# Altium PCB PCB_V1.PcbDoc (part 1 of 2)
Units mm, origin at the board's own origin, x right, y up, seen from the top; angles counter-clockwise.
Board outline 81 x 52 mm, 4 copper layers (Top Layer, Int1 (GND), Int2 (PWR), Bottom Layer), stack 1.369 mm thick; 92 components, 65 nets, 289 pads, 303 vias.
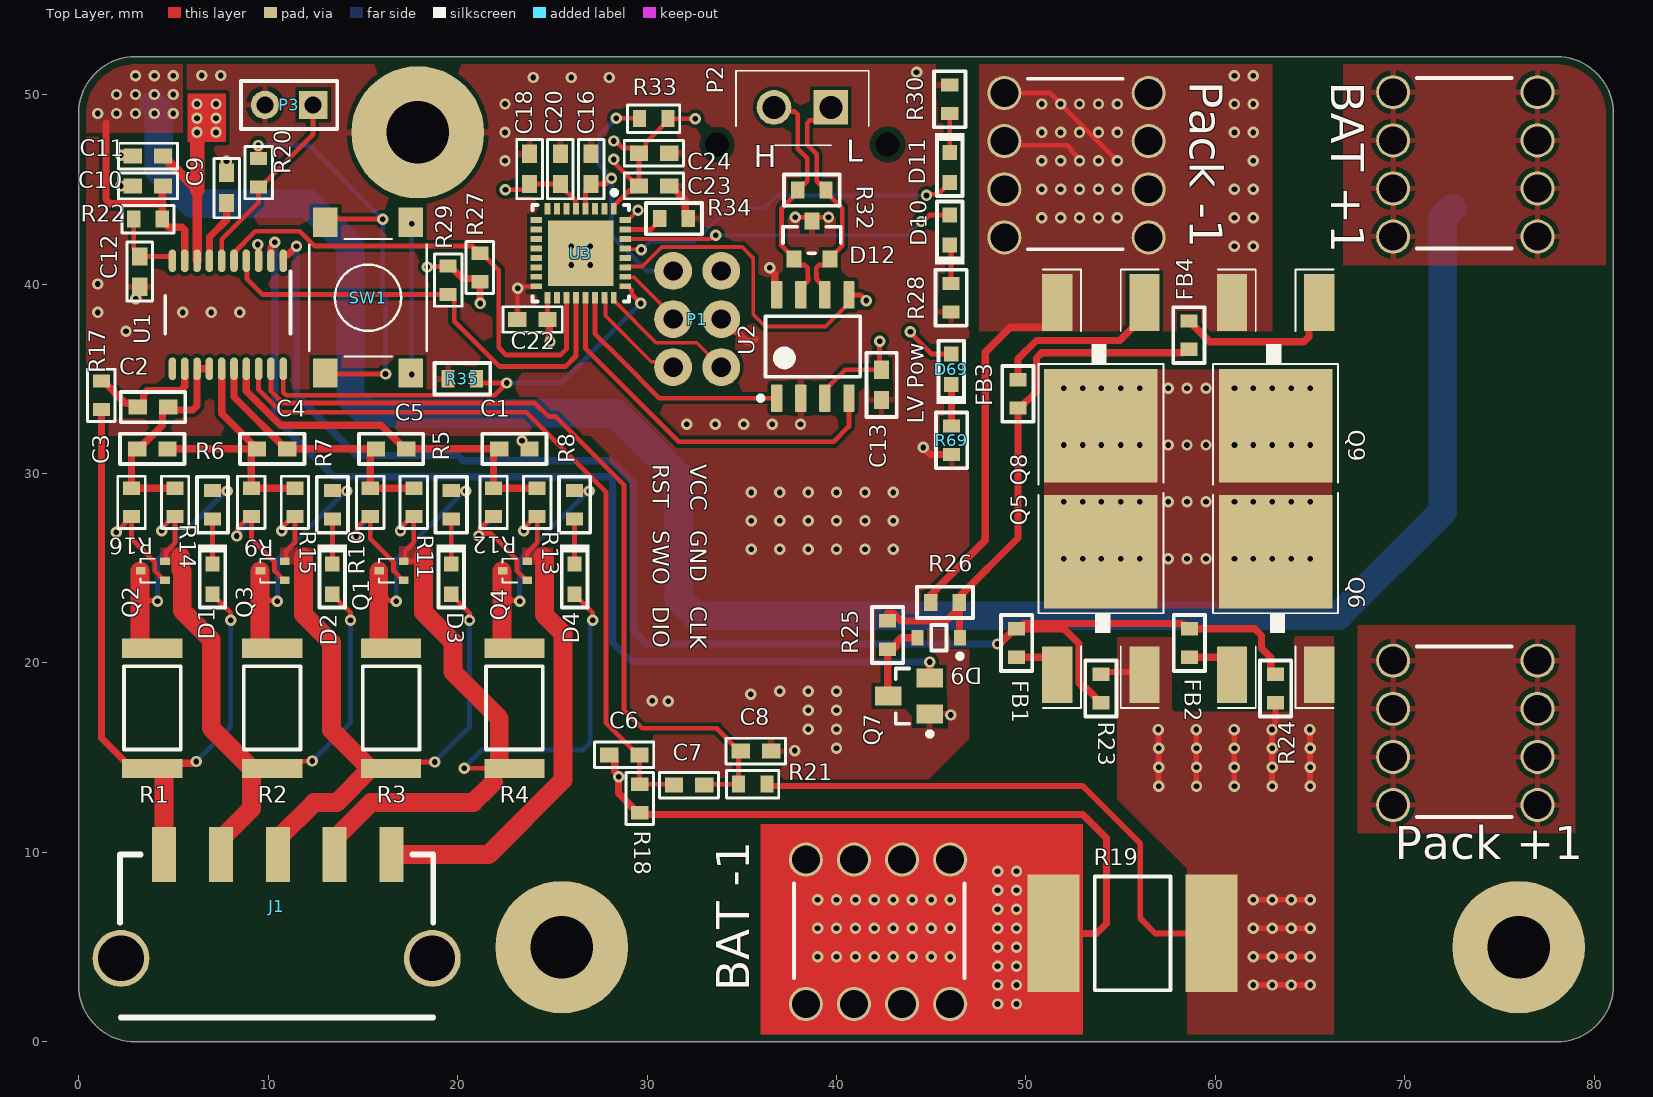
[diagram p0: Top Layer view]
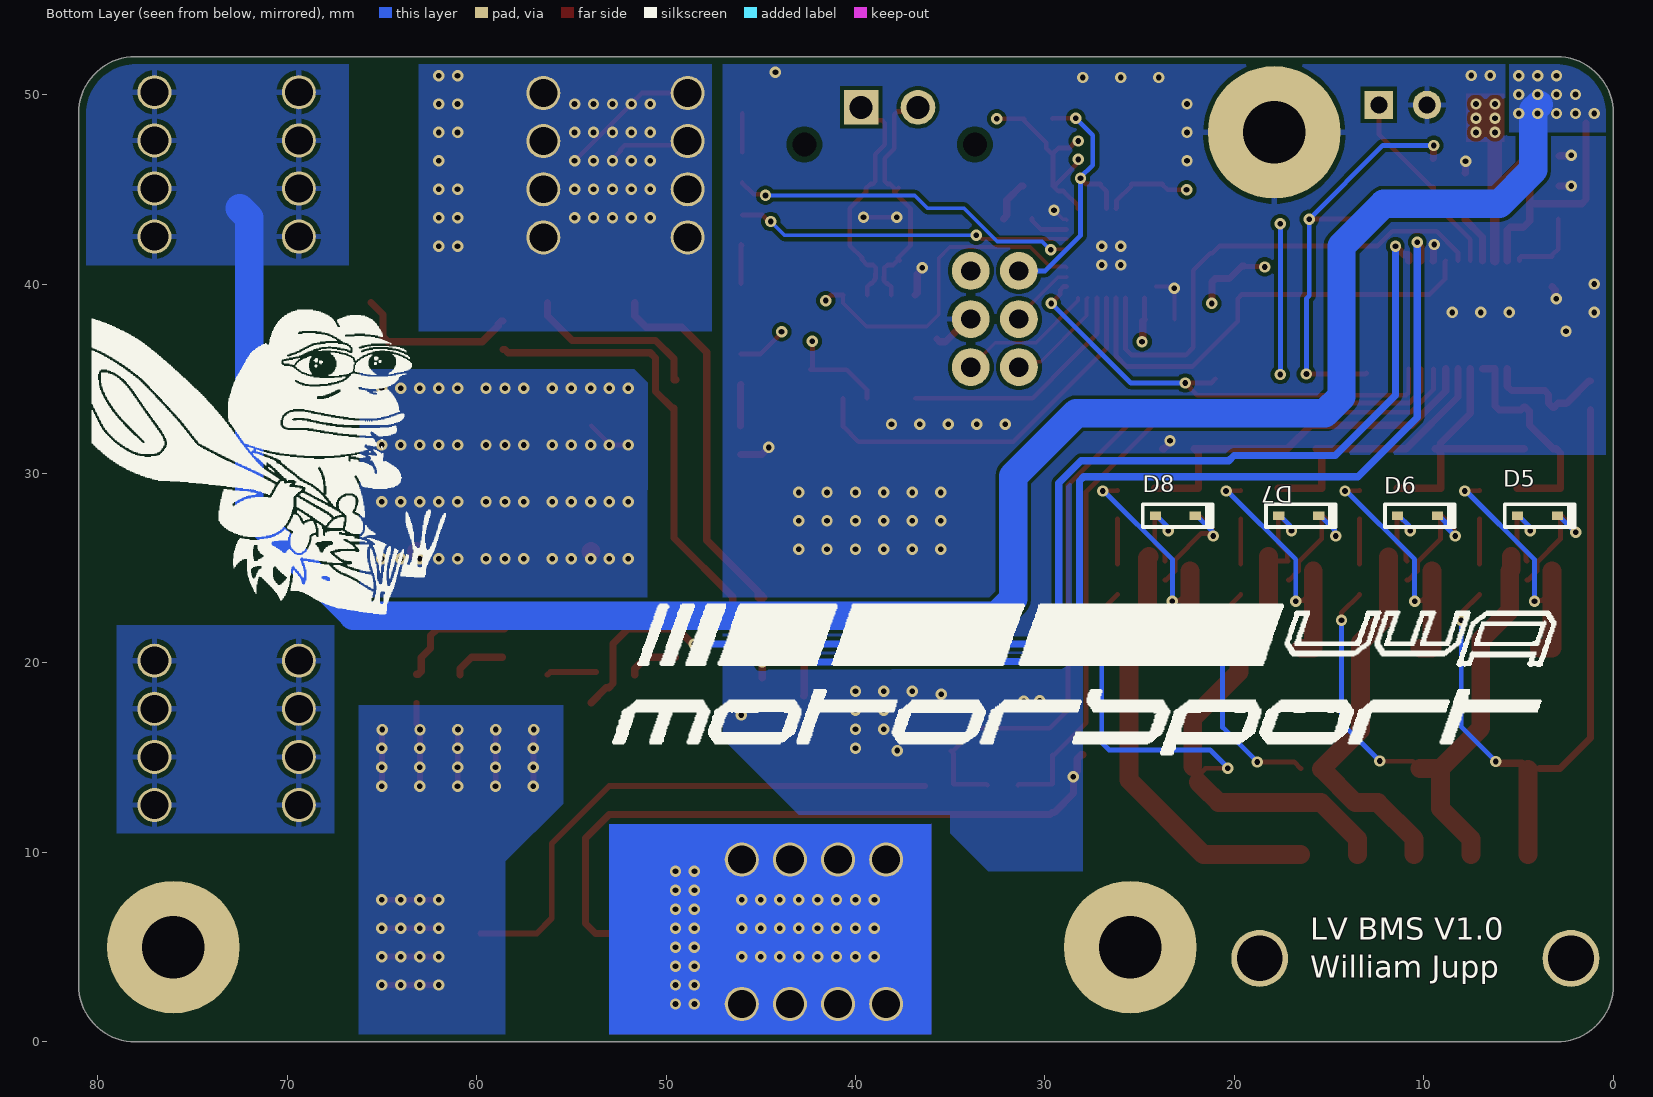
[diagram p1: Bottom Layer view, seen from below]
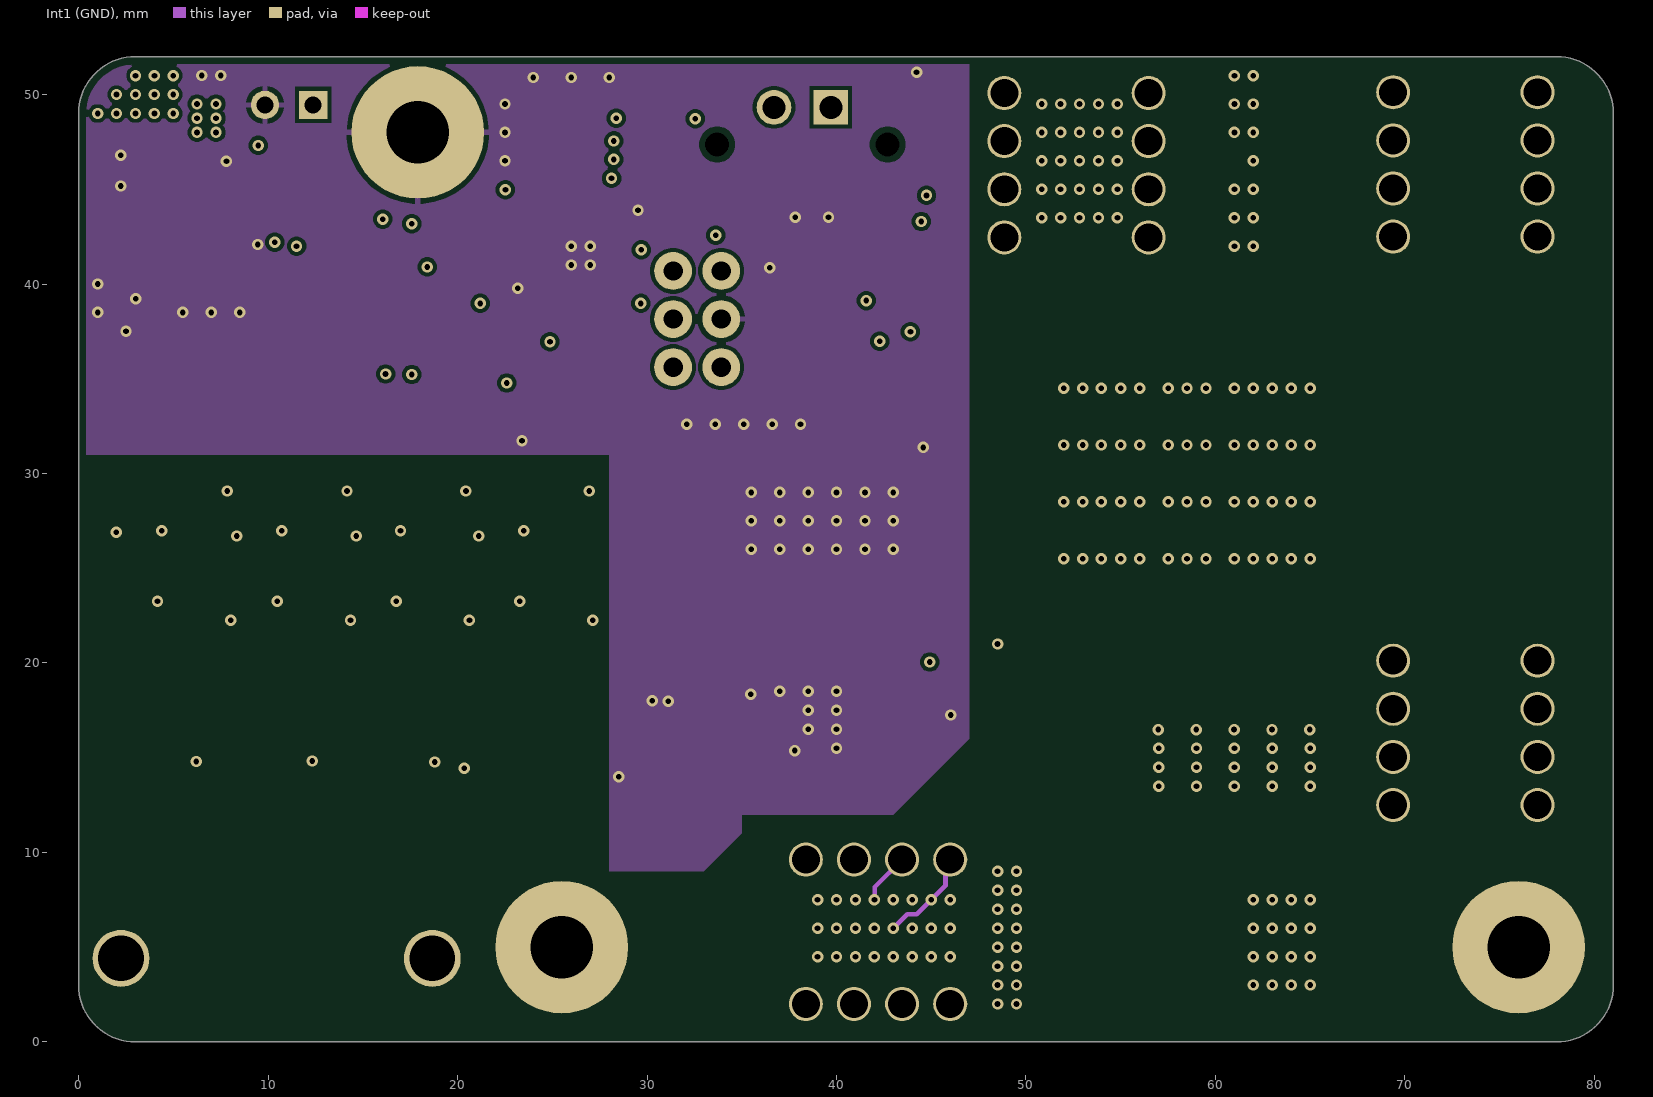
[diagram p2: Int1 (GND)]
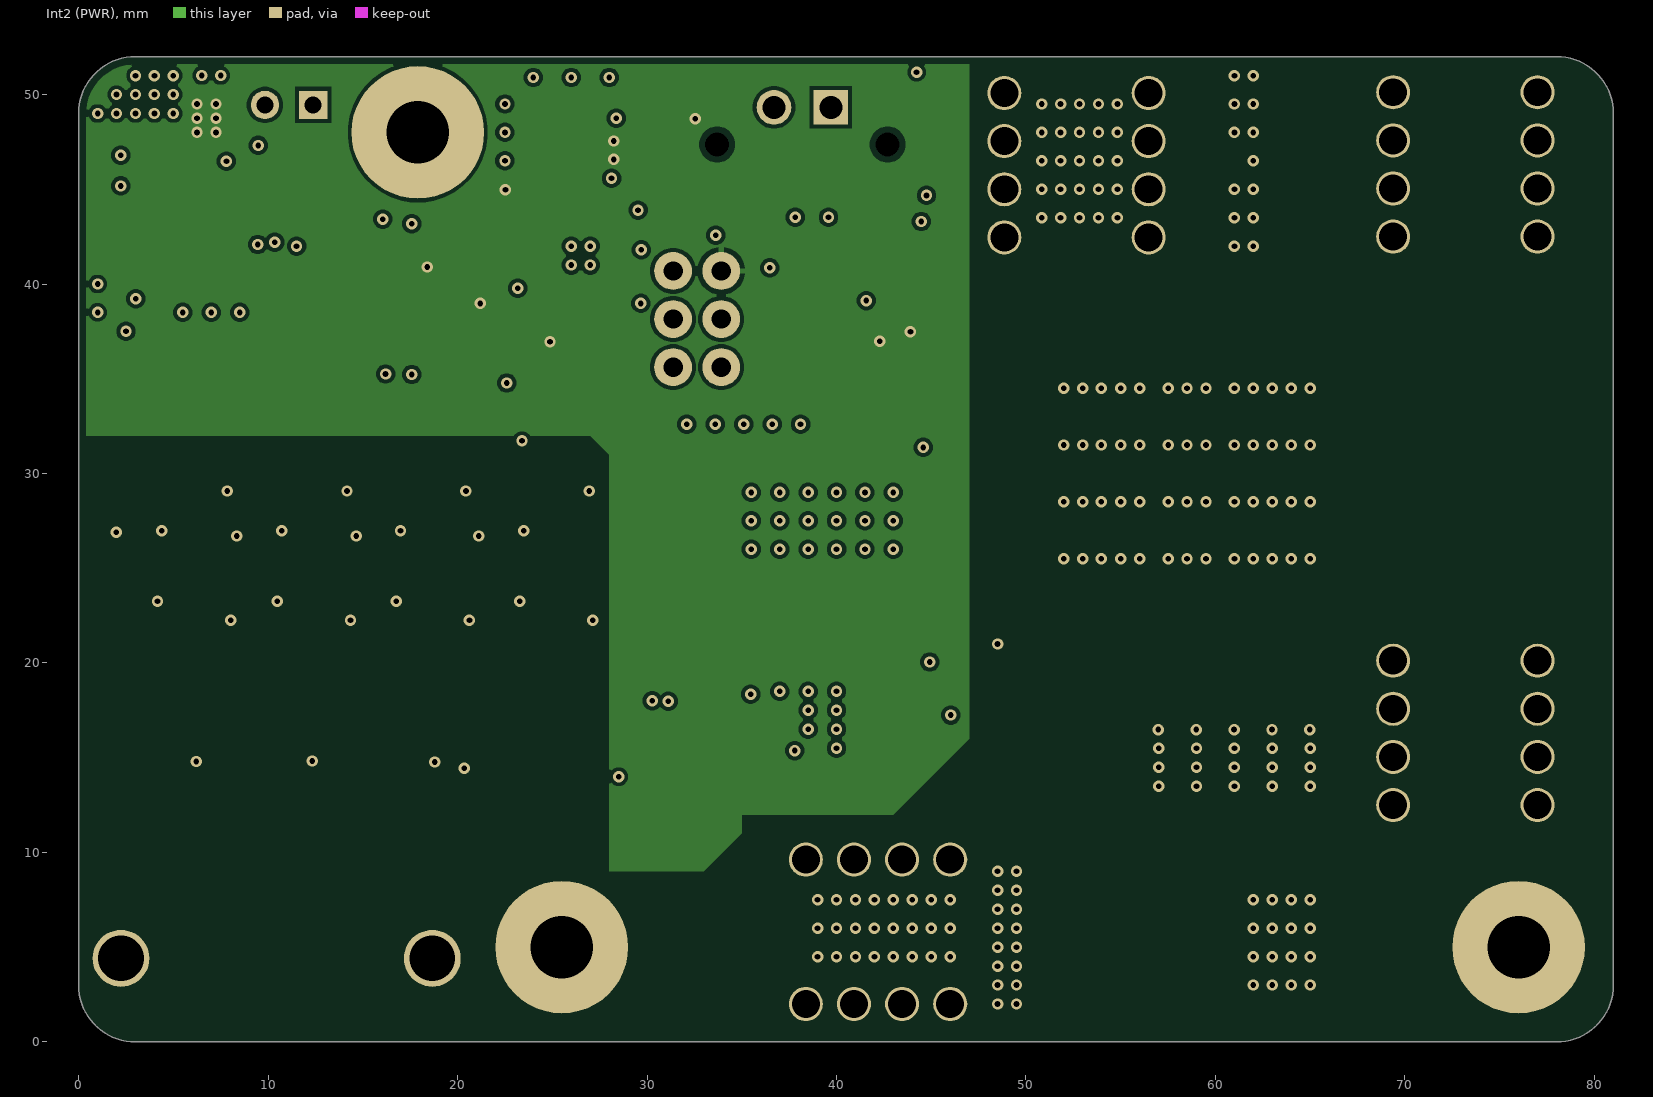
[diagram p3: Int2 (PWR)]
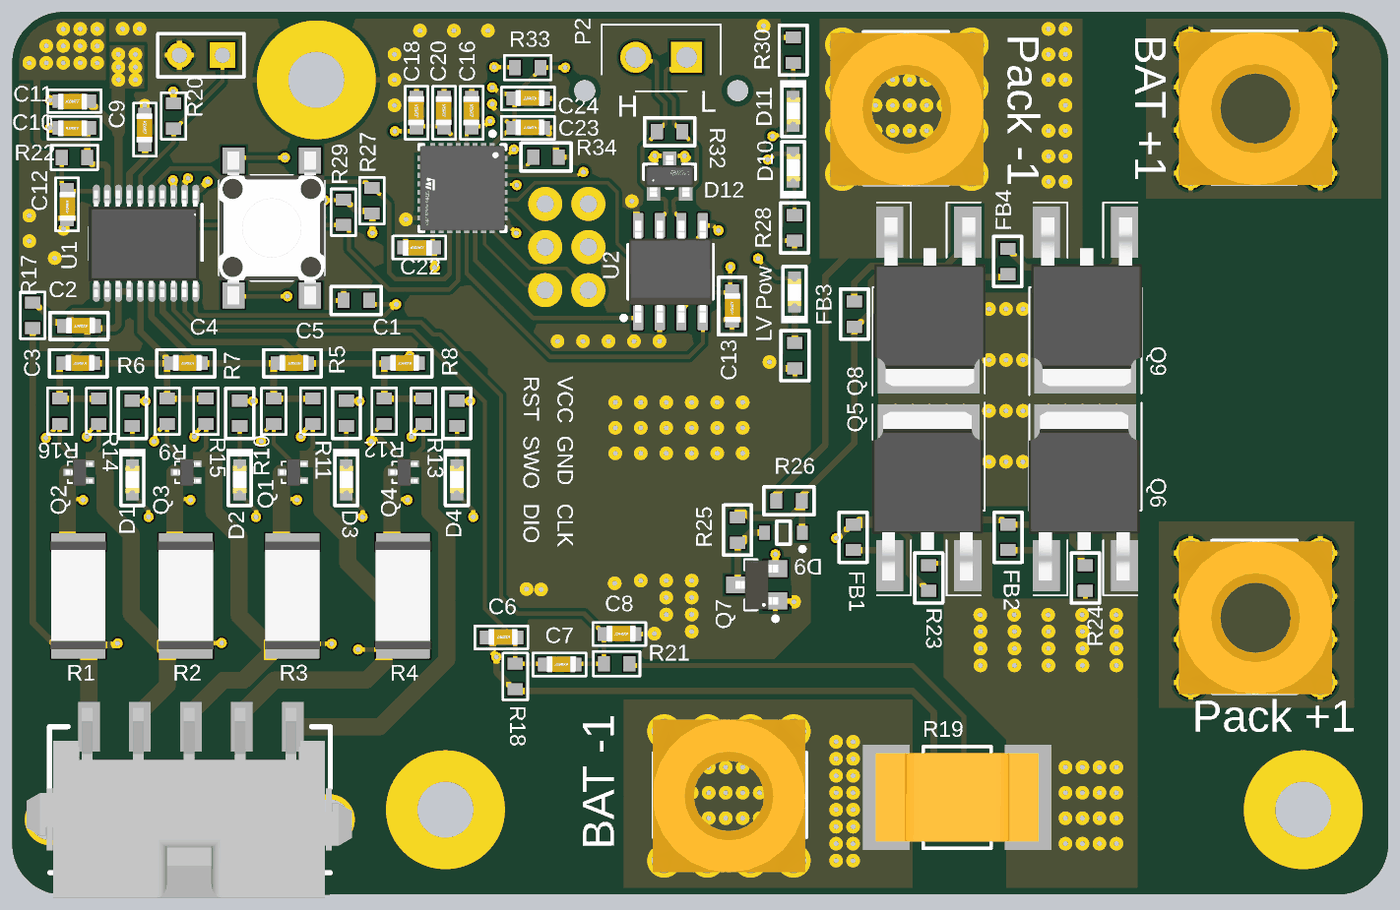
[diagram p4: 3D render of the assembled board from above, using the file's embedded part models]
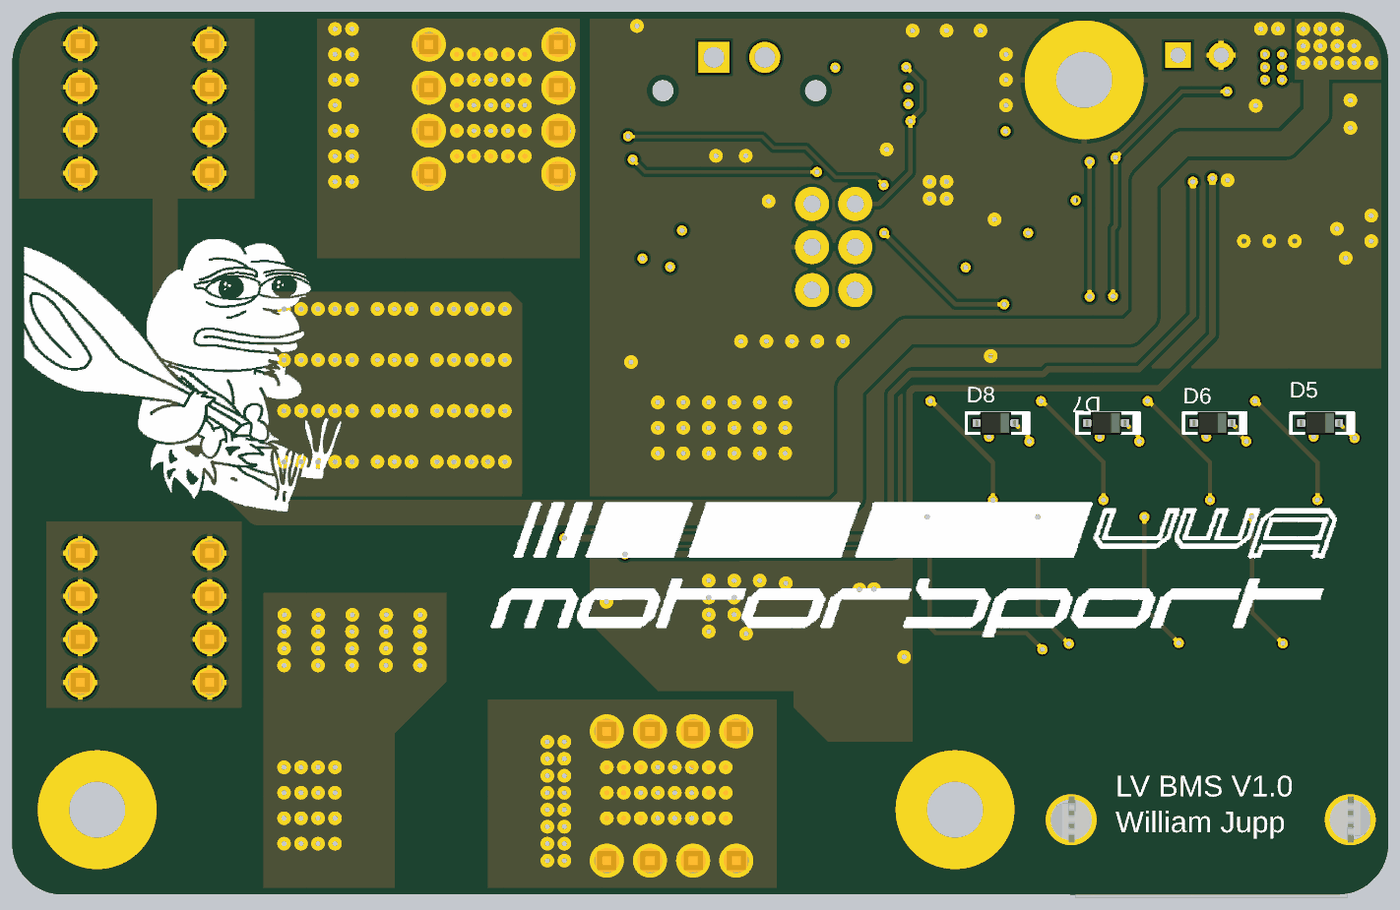
[diagram p5: 3D render of the assembled board from below, using the file's embedded part models]

## Layer stack, top to bottom
Top Solder: solder mask 0.0254, SM-001, Dk 4
Top Layer: signal copper 0.035
Dielectric 1: prepreg 0.1295, PP-017, Dk 4.3
Dielectric 2: prepreg 0.1295, PP-017, Dk 4.3
Int1 (GND): signal copper 0.035
Dielectric 3: core 0.7112, Core-039, Dk 4.8
Int2 (PWR): signal copper 0.035
Dielectric 4: prepreg 0.1295, PP-017, Dk 4.3
Dielectric 5: prepreg 0.1295, PP-017, Dk 4.3
Bottom Layer: signal copper 0.035
Bottom Solder: solder mask 0.0254, SM-001, Dk 4

## Board outline
3,0 cw(c3,3) 0,3 0,49 cw(c3,49) 3,52 78,52 cw(c78,49) 81,49 81,3 cw(c78,3) 78,0

## Design rules (kind name [scope] priority, off if disabled: settings)
BoardOutlineClearance [All] p1: gap=0.4 ignorepadtopadclearanceinfootprint=FALSE except(0: Text-OutlineEdge Text-CavityEdge Text-CutoutEdge Text-SplitBarrior Text-SplitContinuation)
Clearance [All] p1: gap=0.2 ignorepadtopadclearanceinfootprint=TRUE except(0.102: Arc-Via Track-Via SMDPad-Via; 0.152: Arc-Arc Arc-Track Arc-SMDPad Arc-THPad Arc-Text Track-Track Track-SMDPad Track-THPad Track-Text SMDPad-SMDPad SMDPad-THPad SMDPad-Text THPad-Text Via-Text Fill-Text Poly-Text Region-Text Text-Text; 0.3: THPad-Via Via-Via; 0.305: Arc-Hole Track-Hole SMDPad-Hole THPad-Hole Via-Hole Fill-Hole Poly-Hole Region-Hole Text-Hole; 0.45: THPad-THPad)
DiffPairsRouting DiffPair_USBDiffPairsRouting [InDifferentialPair ('USB')] p1: maxlimit=0.254 minlimit=0.127 mostfreqgap=0.254 toplayer_minwidth=0.2 toplayer_maxwidth=0.381 toplayer_prefwidth=0.206 midlayer1_minwidth=0.2 midlayer1_maxwidth=0.381 midlayer1_prefwidth=0.206 midlayer2_minwidth=0.2 midlayer2_maxwidth=0.381 midlayer2_prefwidth=0.206 bottomlayer_minwidth=0.2 bottomlayer_maxwidth=0.381 bottomlayer_prefwidth=0.206 maxuncoupledlength=12.7
DiffPairsRouting [All] p2: maxlimit=0.254 minlimit=0.2 mostfreqgap=0.254 toplayer_minwidth=0.25 toplayer_maxwidth=0.381 toplayer_prefwidth=0.381 midlayer1_mingap=0.254 midlayer1_minwidth=0.381 midlayer1_maxwidth=0.381 midlayer1_prefwidth=0.381 midlayer2_mingap=0.254 midlayer2_minwidth=0.381 midlayer2_maxwidth=0.381 midlayer2_prefwidth=0.381 bottomlayer_minwidth=0.25 bottomlayer_maxwidth=0.381 bottomlayer_prefwidth=0.381 maxuncoupledlength=12.7
HoleSize PTHHoleSize [All] p1: absolutevalues=TRUE maxlimit=5.8 minlimit=0.2 maxpercent=80.000 minpercent=20.000
HoleSize ViaHoleSize [IsVia] p2: absolutevalues=TRUE maxlimit=0.5 minlimit=0.2 maxpercent=80.000 minpercent=20.000
HoleToHoleClearance [All] p1: gap=0.45 allowstackedmicrovias=TRUE
MatchedLengths DiffPair_USBMatchedLengths [InDifferentialPair ('USB')] p1: tolerance=0.127 checknetsindiffpair=FALSE checkdiffpairvsdiffpair=TRUE checkxsignals=TRUE checkothers=TRUE
MinimumAnnularRing Via [IsVia] p1: minimumring=0.1
MinimumAnnularRing PTH [All] p2: minimumring=0.152
MinimumSolderMaskSliver [All] p1: minsoldermaskwidth=0.1
PlaneConnect [All] p1: planeconnectstyle=Direct reliefexpansion=0.508 reliefentries=4 reliefconductorwidth=0.254 reliefairgap=0
PolygonConnect "HC Connect" [InNetClass('HC')] p1: connectstyle=Direct reliefconductorwidth=1 reliefentries=4 polygonreliefangle="90 Angle" airgapwidth=0.254
PolygonConnect [All] p2: thpad.connectstyle=Relief thpad.reliefconductorwidth=0.3 thpad.reliefentries=4 thpad.polygonreliefangle="90 Angle" thpad.airgapwidth=0.254 smdpad.connectstyle=Relief smdpad.reliefconductorwidth=0.3 smdpad.reliefentries=4 smdpad.polygonreliefangle="90 Angle" smdpad.airgapwidth=0.254 via.connectstyle=Direct via.reliefconductorwidth=0.254 via.reliefentries=4 via.polygonreliefangle="90 Angle" via.airgapwidth=0.254
RoutingVias [All] p1: holewidth=0.3 width=0.6 viastyle="Through Hole" minholewidth=0.2 minwidth=0.45 maxholewidth=6.3 maxwidth=2
SilkToSilkClearance [All] p1: silktosilkclearance=0
SilkToSolderMaskClearance [IsPad] p1: minsilkscreentomaskgap=0.152 clearancetoexposedcopper=TRUE
SolderMaskExpansion [All] p1: expansion=0.102 istentingtop=FALSE
UnRoutedNet [All] p1: checkbadconnections=TRUE
Width [All] p1: maxlimit=30 minlimit=0.102 preferedwidth=0.25
22 further rules are at their usual default settings.

## Classes and differential pairs
net class HC: NetD2_2 NetD3_2 NetD4_2 NetD8_2 NetQ5_2 "Pack -" Rsns-
component class MCU: C13 C16 C18 C20 C22 C23 C24 D10 D11 D12 D69 P1 P2 R27 R28 R29 R30 R32 R33 R34 R69 U2 U3
component class "bq76920 IC": 3 "BAT +1" "BAT -1" C1 C2 C3 C4 C5 C6 C7 C8 C9 C10 C11 C12 D1 D2 D3 D4 D5 D6 D7 D8 D9 FB1 FB2 FB3 FB4 J1 P3 "Pack +1" "Pack -1" Q1 Q2 Q3 Q4 Q5 Q6 Q7 Q8 Q9 R1 R2 R3 R4 R5 R6 R7 R8 R9 R10 R11 R12 R13 R14 R15 R16 R17 R18 R19 R20 R21 R22 R23 R24 R25 R26 R35 SW1 U1
differential pair CAN: +CAN_P -CAN_N

## Components (designator, comment, footprint, x,y, rotation, side; value= is the part's Value field where it differs from the comment)
"BAT +1" "7460305" 7460305 69.38,50.12 r0 top
"BAT -1" "7460305" 7460305 46,9.62 r270 top
C1 "C0603C224K3RECAUTO" C_0603 23.8,31.3 r180 top value=0.22uF
C2 "C0603C224K3RECAUTO" C_0603 4.725,33.5 r180 top value=0.22uF
C3 "C0603C224K3RECAUTO" C_0603 4.69,31.3 r180 top value=0.22uF
C4 "C0603C224K3RECAUTO" C_0603 11.015,31.3 r180 top value=0.22uF
C5 "C0603C224K3RECAUTO" C_0603 17.29,31.3 r180 top value=0.22uF
C6 "C0603X104K5RAC7411" C_0603 29.6,15.15 r180 top value=100nF
C7 "C0603X104K5RAC7411" C_0603 33.025,13.55 r180 top value=100nF
C8 "C0603X104K5RAC7411" C_0603 36.55,15.35 r180 top value=100nF
C9 "C0603C105K9RAC7411" C_0603 7.812,45.875 r270 top value=1uF
C10 "CL10B105KA8VPNC" C_0603 2.85,45.175 r0 top value=1uF
C11 "JMK107BB7475KA-T" C_0603 2.85,46.75 r0 top value=4.7uF
C12 "GRM188R6YA106MA73J" C_0603 3.225,39.85 r90 top
C13 "06035C104JAT4A" C_0603 42.375,33.875 r90 top value=0.1uF
C16 "C0603X104K5RAC7411" C_0603 27.05,46.875 r270 top value=100nF
C18 "C0603C105K9RAC7411" C_0603 23.8,46.875 r270 top value=1uF
C20 "JMK107ABJ106KAHT" C_0603 25.425,46.875 r270 top value=10uF
C22 "C0603X104K5RAC7411" C_0603 23.15,38.125 r0 top value=100nF
C23 "C0603X104K5RAC7411" C_0603 31.175,45.175 r180 top value=100nF
C24 "JMK107BB7475KA-T" C_0603 31.175,46.9 r180 top value=4.7uF
D1 "150060BS55040" 150060xS55040 7.065,24.425 r270 top
D2 "150060BS55040" 150060xS55040 13.39,24.425 r270 top
D3 "150060BS55040" 150060xS55040 19.665,24.425 r270 top
D4 "150060BS55040" 150060xS55040 26.175,24.425 r270 top
D5 "MMSZ5232BS-7-F" MMSZ5232BS-7-F 2.952,27.775 r0 bottom
D6 "MMSZ5232BS-7-F" MMSZ5232BS-7-F 9.277,27.775 r0 bottom
D7 "MMSZ5232BS-7-F" MMSZ5232BS-7-F 15.552,27.775 r0 bottom
D8 "MMSZ5232BS-7-F" MMSZ5232BS-7-F 22.062,27.775 r0 bottom
D9 "MMDL6050T1G" ONSC-SOD-323-2-477-02_V 45.4,21.325 r180 top
D10 "150060RS55040" 150060xS55040 45.975,42.85 r90 top
D11 "150060BS55040" 150060xS55040 45.975,46.15 r270 top
D12 "SZNUP3105LT3G" FP-318-08-MFG 38.7,42.325 r90 top value=30pF
D69 "150060RS55040" 150060xS55040 46.05,35.5 r90 top
FB1 "BLM18SG221TN1D" R-0603 49.5,20.3 r90 top
FB2 "BLM18SG221TN1D" R-0603 58.625,20.3 r90 top
FB3 "BLM18SG221TN1D" R-0603 49.575,34.95 r270 top
FB4 "BLM18SG221TN1D" R-0603 58.6,38.05 r270 top
J1 "2-1445090-5" 2-1445090-5 10.45,7.15 r180 top
P1 "SWD Holes" "2*3 2.54mm header" 31.375,40.69 r270 top
P2 "Nothing" "2x1 2.54MM PITCH" 39.7,49.325 r180 top
P3 "For thermistor" HDR1X2 12.375,49.45 r180 top
"Pack +1" "7460305" 7460305 69.38,20.12 r0 top
"Pack -1" "7460305" 7460305 48.855,50.08 r0 top
Q1 "DMG1012T-13" SOT-523-3 16.515,24.875 r90 top
Q2 "DMG1012T-13" SOT-523-3 3.915,24.875 r90 top
Q3 "DMG1012T-13" SOT-523-3 10.24,24.875 r90 top
Q4 "DMG1012T-13" SOT-523-3 23.025,24.875 r90 top
Q5 "TK25S06N1L,LXHQ" DPAK+ 51.65,19.375 r0 top
Q6 "TK25S06N1L,LXHQ" DPAK+ 60.875,19.375 r0 top
Q7 "FDN5618P" FAIR-SSOT3L-3_V 43.825,18.25 r180 top
Q8 "TK25S06N1L,LXHQ" DPAK+ 56.25,39.025 r180 top
Q9 "TK25S06N1L,LXHQ" DPAK+ 65.475,39.025 r180 top
R1 "CRCW251221R0FKEGHP" R_2512 3.89,14.425 r90 top value=21R
R2 "CRCW251221R0FKEGHP" R_2512 10.215,14.425 r90 top value=21R
R3 "CRCW251221R0FKEGHP" R_2512 16.49,14.425 r90 top value=21R
R4 "CRCW251221R0FKEGHP" R_2512 23,14.425 r90 top value=21R
R5 "RT0603DRE07583RL" R-0603 19.665,27.6 r90 top value=583R
R6 "RT0603DRE07583RL" R-0603 7.065,27.6 r90 top value=583R
R7 "RT0603DRE07583RL" R-0603 13.39,27.6 r90 top value=583R
R8 "RT0603DRE07583RL" R-0603 26.175,27.6 r90 top value=583R
R9 "CMP0603AFX-1002ELF" R-0603 9.115,27.725 r90 top value=10K
R10 "CMP0603AFX-1002ELF" R-0603 15.39,27.725 r90 top value=10K
R11 "CRCW06031K00FKEAC" R-0603 17.69,27.725 r90 top value=1k
R12 "CMP0603AFX-1002ELF" R-0603 21.9,27.725 r90 top value=10K
R13 "CRCW06031K00FKEAC" R-0603 24.2,27.725 r90 top value=1K
R14 "CRCW06031K00FKEAC" R-0603 5.09,27.725 r90 top value=1k
R15 "CRCW06031K00FKEAC" R-0603 11.415,27.725 r90 top value=1k
R16 "CMP0603AFX-1002ELF" R-0603 2.79,27.725 r90 top value=10K
R17 "CRCW06031K00FKEAC" R-0603 1.2,33.375 r90 top value=1k
R18 "RN73R1JTTD1000F50" R-0603 29.615,12.1 r90 top value=100
R19 "PU3921FKM130R004L" PU3921FKM130R004L 55.625,5.725 r180 top value=4m
R20 "CMP0603AFX-1002ELF" R-0603 9.5,45.125 r90 top value=10k
R21 "RN73R1JTTD1000F50" R-0603 36.325,13.6 r180 top value=100
R22 "RN73R1JTTD1000F50" R-0603 2.913,43.425 r0 top value=100
R23 "CRCW06031M00FKEAC" R-0603 53.95,17.9 r90 top value=1M
R24 "CRCW06031M00FKEAC" R-0603 63.175,19.4 r270 top value=1M
R25 "CRCW06031M00FKEAC" R-0603 42.7,20.725 r90 top value=1M
R26 "CRCW06031M00FKEAC" R-0603 46.475,23.2 r180 top value=1M
R27 "CRCW06031K10JNEAC" R-0603 21.175,41.625 r270 top value=1k1
R28 "RT0603DRE07583RL" R-0603 46.05,40.025 r270 top value=630R
R29 "CRCW06031K10JNEAC" R-0603 19.5,39.45 r90 top value=1k1
R30 "RT0603DRE07583RL" R-0603 45.975,49 r90 top value=583R
R32 "Dont populate" R-0603 39.45,44.95 r180 top value=120R
R33 "CMP0603AFX-1002ELF" R-0603 29.6,48.725 r0 top value=10K
R34 "CMP0603AFX-1002ELF" R-0603 30.675,43.45 r0 top value=10K
R35 "CRCW06031M00FKEAC" R-0603 21,35 r180 top value=1M
R69 "RT0603DRE07583RL" R-0603 46.075,32.5 r270 top value=630R
SW1 "430152043836" 430152043836 15.275,39.275 r90 top
U1 "BQ76920" TSSOP-20 7.875,38.375 r270 top
U2 "SN65HVD233D" D0008A_N 38.75,36.7 r90 top
U3 "STM32L432KBU6" FP-UFQFPN32-A0B8-MFG 26.5,41.625 r270 top

## Footprints (in the part's own frame and the unit in brackets; to place one, negate y for a bottom-side part, rotate by r counter-clockwise, add the part's x,y. Pads: shape width x height; smd on the part's side, far side on the other; paste and mask are expansions set on the pad)
"2*3 2.54mm header" [mm]
  round 2 hole 1.02 mask+0: 1(0,0) 2(2.54,0) 3(5.08,0) 4(5.08,2.54) 5(2.54,2.54) 6(0,2.54)
2-1445090-5 [mm] "5pos Micro Mate-n-lok"
  rect 1.27x2.92 smd mask+0: 1(-6.065,-2.74) 2(-3.065,-2.74) 3(-0.065,-2.74) 4(2.935,-2.74) 5(5.935,-2.74)
  round 3 hole 2.41 unplated mask+0: MH(-8.215,2.74) MH(8.215,2.74)
  silkscreen extent -8.26,-2.74 8.27,5.86, body extent -9.54,-3.84 9.6,7.32, height 5.68
"2x1 2.54MM PITCH" [mm]
  rect 1.83x1.83 hole 1.22: 1(0,0)
  round 1.83 hole 1.22: 2(3,0)
  round 0.675 hole 1.27 unplated: MH1(-3,1.96) MH1(6,1.96)
  silkscreen extent -2,-1.93 5,2
150060xS55040 [mm] "Red LED"
  rect 0.8x0.75 smd mask+0: 1(-0.8,0) 2(0.8,0)
  silkscreen extent -1.83,-0.77 1.5,0.78, body extent -0.82,-0.4 0.78,0.4, height 0.41
7460305 [mm] "M5 Stuf"
  round 1.8 hole 1.475: 1(0,-7.62) 1(0,-5.08) 1(0,-2.54) 1(0,0) 1(7.62,-7.62) 1(7.62,-5.08) 1(7.62,-2.54) 1(7.62,0)
  silkscreen extent 1.25,-8.25 6.25,0.75, body extent -0.69,-8.31 8.31,0.69, height 7
430152043836 [mm] "6*6mm vertical type, SMD, height 4.3mm, salmon actuator, 360gf, T&R"
  rect 1.55x1.3 smd: 1(-3.975,2.25) 2(-3.975,-2.25) 3(3.975,2.25) 4(3.975,-2.25)
  silkscreen extent -3.1,-3.1 3.1,3.1, body extent -4.5,-3.1 4.5,3.1, height 4.29
C_0603 [mm] "0603 Capacitor"
  rect 0.965x0.8 smd: 1(0,0) 2(1.6,0)
  silkscreen extent -0.9,-0.8 2.5,0.8, body extent -0.17,-0.5 1.57,0.45, height 0.88
D0008A_N [mm] "SOIC, 8-Leads, Body 5x4mm, Pitch 1.27mm, IPC Medium Density"
  rrect17% 1.45x0.6 smd: 1(-2.725,1.905) 2(-2.725,0.635) 3(-2.725,-0.635) 4(-2.725,-1.905) 5(2.725,-1.905) 6(2.725,-0.635) 7(2.725,0.635) 8(2.725,1.905)
  silkscreen extent -2.85,-2.5 1.6,2.88, body extent -3,-2.45 3,2.45, height 1.63
DPAK+ [mm] "Power MOSFET (N-ch single 30V<VDSS=60V)"
  rect 1.6x3 smd mask+0: 1(0,0) 3(4.6,0)
  rect 6x6 smd mask+0: 2(2.3,6.5)
  silkscreen extent -1,-1.75 5.6,9.6, body extent -1.04,-0.87 5.5,9.07, height 2.3
FAIR-SSOT3L-3_V [mm] "SOT23, 3-Leads, Body 2.92x1.4mm, Pitch 0.95mm"
  rect 1.4x1 smd: 1(-1.1,0.95) 2(-1.1,-0.95) 3(1.1,0)
  silkscreen extent -1.23,-1.46 0.7,2.12, body extent -1.26,-1.46 1.26,1.46, height 1.12
FP-318-08-MFG [mm]
  rect 0.9x0.8 smd paste+0 mask+0: 1(-1,0.95) 2(-1,-0.95) 3(1,0)
  silkscreen extent -0.7,-1.52 0.7,1.52, body extent -1.55,-1.62 1.55,1.62, height 0.25
FP-UFQFPN32-A0B8-MFG [mm]
  rect 0.6x0.3 smd paste+0 mask+0: 1(-2.35,1.75) 2(-2.35,1.25) 3(-2.35,0.75) 4(-2.35,0.25) 5(-2.35,-0.25) 6(-2.35,-0.75) 7(-2.35,-1.25) 8(-2.35,-1.75) 17(2.35,-1.75) 18(2.35,-1.25) 19(2.35,-0.75) 20(2.35,-0.25) 21(2.35,0.25) 22(2.35,0.75) 23(2.35,1.25) 24(2.35,1.75)
  rect 0.3x0.6 smd paste+0 mask+0: 9(-1.75,-2.35) 10(-1.25,-2.35) 11(-0.75,-2.35) 12(-0.25,-2.35) 13(0.25,-2.35) 14(0.75,-2.35) 15(1.25,-2.35) 16(1.75,-2.35) 25(1.75,2.35) 26(1.25,2.35) 27(0.75,2.35) 28(0.25,2.35) 29(-0.25,2.35) 30(-0.75,2.35) 31(-1.25,2.35) 32(-1.75,2.35)
  rect 3.45x3.45 smd paste+0 mask+0: 33(0,0)
  silkscreen extent -3.32,-2.55 2.55,2.55, body extent -2.75,-2.75 2.75,2.75, height 0.25
HDR1X2 [mm] "Connector; Header; 2 Position"
  rect 1.5x1.5 hole 0.9: 1(0,0)
  round 1.5 hole 0.9: 2(2.54,0)
  silkscreen extent -1.27,-1.27 3.81,1.27
MMSZ5232BS-7-F [mm] "Balance Diode"
  rect 0.59x0.45 smd: 1(0,0) 2(2.11,0)
  silkscreen extent -0.9,-0.6 2.78,0.6, body extent -0.25,-0.67 2.35,0.68, height 1.12
ONSC-SOD-323-2-477-02_V [mm] "SOD, 2-Leads, Body 1.7x1.25mm"
  rect 0.63x0.83 smd: 1(-1.115,0) 2(1.115,0)
  silkscreen extent -1.24,-0.67 0.4,1.09, body extent -0.85,-0.63 0.85,0.63, height 1.06
PU3921FKM130R004L [mm] "4mOhm sense resistor"
  rect 2.75x6.2 smd mask+0: 1(-4.175,0) 2(4.175,0)
  silkscreen extent -2,-3 2,3, body extent -4.8,-2.6 4.8,2.6, height 0.89
R-0603 [mm] "0603 Resistor"
  rect 0.7x0.9 smd: 1(0,0) 2(1.5,0)
  silkscreen extent -0.72,-0.82 2.22,0.82, body extent -0.1,-0.48 1.6,0.47, height 0.9
R_2512 [mm] "2512 Resistor"
  rect 1.02x3.18 smd: 1(0,0) 2(6.35,0)
  silkscreen extent 1,-1.5 5.4,1.5, body extent 0.03,-1.63 6.37,1.63, height 0.62
SOT-523-3 [mm] "MOSFET"
  rect 0.4x0.51 smd mask+0: 1(-0.5,-0.645) 2(0.5,-0.645) 3(0,0.645)
  silkscreen extent -0.62,-0.13 0.63,0.65, body extent -0.8,-0.85 0.8,0.78, height 0.81
TSSOP-20 [mm] "Battery Management Li-Ion, Li-Phosphate Battery Moniter"
  oval 1.2x0.4 smd paste+0 mask+0: 1(-2.85,2.925) 2(-2.85,2.275) 3(-2.85,1.625) 4(-2.85,0.975) 5(-2.85,0.325) 6(-2.85,-0.325) 7(-2.85,-0.975) 8(-2.85,-1.625) 9(-2.85,-2.275) 10(-2.85,-2.925) 11(2.85,-2.925) 12(2.85,-2.275) 13(2.85,-1.625) 14(2.85,-0.975) 15(2.85,-0.325) 16(2.85,0.325) 17(2.85,0.975) 18(2.85,1.625) 19(2.85,2.275) 20(2.85,2.925)
  silkscreen extent -2.29,-3.3 1,3.3, body extent -3.11,-3.38 3.18,3.12, height 1.1

## Part data
"BAT +1" "BAT -1" "Pack +1" "Pack -1": "WP-BUTR Press-Fit with Internal thread, two rows, 9x9mm, 8 pins, M5x6mm, 160A", Operating Temperature="-55 to +150degC", Rated Current=160A, ComponentLink1Description=Manufacturer, ComponentLink1URL=http://www.we-online.de, ComponentLink2Description=Datasheet, ComponentLink2URL=https://katalog.we-online.com/em/datasheet/7460305.pdf, Height=7mm, Material=Brass, Mounting Technology=Press-Fit, Packaging=Bulk, Part Number=7460305, Pin Number=8, Published Date="September 2019", Publisher="Wurth Elektronik", Size=9x9mm, Surface=Tin, Thread=M5, Thread Length=6mm
C1 C2 C3 C4 C5: library part Capacitor, "Cap Ceramic 0.22uF 25V X7R 10% Pad SMD 0603 125C Automotive T/R", Capacitance=220nF, Case Code (Imperial)=0603, Case Code (Metric)=1608, Manufacturer=KEMET, Max Operating Temperature=125°C, Min Operating Temperature=-55°C, Ratings=AEC-Q200, Supplier Part Number 1=80-C0603C224K3REAUTO, Tolerance=10%, Voltage Rating=25V, Case/Package=0603, Category="Ceramic Capacitors", ComponentLink1Description=http://www.farnell.com/datasheets/2314375.pdf?src-supplier=Farnell, ComponentLink1URL=http://www.farnell.com/datasheets/2314375.pdf?src-supplier=Farnell, ComponentLink2Description=https://api.kemet.com/component-edge/download/datasheet/C0603C224K3RECAUTO.pdf?src-supplier=Digi-Key, ComponentLink2URL=https://api.kemet.com/component-edge/download/datasheet/C0603C224K3RECAUTO.pdf?src-supplier=Digi-Key, Manufacturer Part Number=C0603C224K3RECAUTO, Mount="Surface Mount", Packaging="Tape and Reel", Pricing 1="1=0.27000, 10=0.12200, 50=0.12200, 100=0.10400, 1000=0.06400, 10000=0.05300 (USD)", RoHS=Yes, RoHS Compliant=Yes, Stock 1=9648, Supplier 1=Mouser
C6 C7 C8 C16 C22 C23: library part Capacitor, "CAP CER 0.1UF 50V X7R 0603", Capacitance=100nF, Case Code (Imperial)=0603, Case Code (Metric)=1608, Dielectric Material=Ceramic, Manufacturer=KEMET, Max Operating Temperature=125°C, Min Operating Temperature=-55°C, Package Quantity=1, Supplier Part Number 1=2053261, Tolerance=10%, Voltage Rating=50V, Case/Package=0603, Category="Ceramic Capacitors", ComponentLink1Description=https://api.kemet.com/component-edge/download/datasheet/C0603X104K5RAC7411.pdf?src-supplier=Digi-Key, ComponentLink1URL=https://api.kemet.com/component-edge/download/datasheet/C0603X104K5RAC7411.pdf?src-supplier=Digi-Key, ComponentLink2Description=http://www.farnell.com/datasheets/2747793.pdf?src-supplier=Newark, ComponentLink2URL=http://www.farnell.com/datasheets/2747793.pdf?src-supplier=Newark, Features="Soft Termination", Length=0.064inch, Manufacturer Part Number=C0603X104K5RAC7411, Mount="Surface Mount", Packaging="Cut Tape", Pricing 1="15000=0.02900, 45000=0.02700 (USD)", RoHS=Yes, RoHS Compliant=Yes, Stock 1=28600, Supplier 1=RSComponents, Thickness=0.034inch, Voltage Rating (DC)=50V, Width=0.032inch
C9 C18: library part Capacitor, "Capacitor", Manufacturer=KEMET, Supplier Part Number 1=80-C0603C105K9R7411, Manufacturer Part Number=C0603C105K9RAC7411, Pricing 1="1=0.25000, 10=0.10200, 50=0.10200, 100=0.08700, 1000=0.05300, 10000=0.04400 (USD)", RoHS=Yes, RoHS Compliant=Yes, Supplier 1=Mouser
  C9: ComponentLink1Description="New link", Stock 1=22545
  C18: Stock 1=22716
C10: library part Capacitor, "Cap Ceramic 1uF 25V X7R 10% Pad SMD 0603 125°C Automotive T/R", Capacitance=1uF, Case Code (Imperial)=0603, Case Code (Metric)=1608, Manufacturer=KEMET, Manufacturer Part Number=C0603C105K9RAC7411, Max Operating Temperature=125°C, Min Operating Temperature=-55°C, Ratings=AEC-Q200, Supplier Part Number 1=80-C0603C105K9R7411, Tolerance=10%, Voltage Rating=25V, Case/Package=0603, Category="Ceramic Capacitors", ComponentLink1Description="New link", ComponentLink2Description=http://www.samsungsem.com/global/front/downloadcms.do?path=%2F%2Fglobal%2F%2Fsupport%2F%2Fproduct-search%2F%2Fmlcc%2F%2F__icsFiles%2F%2Fafieldfile%2F%2F2017%2F%2F05%2F%2F25&fileName=CL10B105KA8VPNC.pdf&src-supplier=Digi-Key, ComponentLink2URL=http://www.samsungsem.com/global/front/downloadcms.do?path=%2F%2Fglobal%2F%2Fsupport%2F%2Fproduct-search%2F%2Fmlcc%2F%2F__icsFiles%2F%2Fafieldfile%2F%2F2017%2F%2F05%2F%2F25&fileName=CL10B105KA8VPNC.pdf&src-supplier=Digi-Key, ComponentLink3Description=http://www.samsungsem.com/servlet/FileDownload?filename=productcatalog/pdf/MLCC.pdf&src-supplier=Avnet, ComponentLink3URL=http://www.samsungsem.com/servlet/FileDownload?filename=productcatalog/pdf/MLCC.pdf&src-supplier=Avnet, Features="Soft Termination", Length=0.063inch, Mount="Surface Mount", Packaging="Tape and Reel", Pricing 1="1=0.25000, 10=0.10200, 50=0.10200, 100=0.08700, 1000=0.05300, 10000=0.04400 (USD)", Pricing 2="1=0.20000, 10=0.14500, 50=0.14500, 100=0.06900, 1000=0.04200, 10000=0.04000 (USD)", RoHS=Yes, RoHS Compliant=Yes, Stock 1=22545, Stock 2=72139, Supplier 1=Mouser, Supplier 2=Mouser, Supplier Part Number 2=187-CL10B105KA8VPNC, Thickness=0.035inch, Width=0.031inch
C11 C24: library part Capacitor, "Cap Ceramic 4.7uF 6.3V X7R 10% Pad SMD 0603 125°C T/R", Capacitance=4.7uF, Case Code (Imperial)=0603, Case Code (Metric)=1608, Manufacturer="Taiyo Yuden", Max Operating Temperature=125°C, Min Operating Temperature=-55°C, Supplier Part Number 1=963-JMK107BB7475KA-T, Tolerance=10%, Voltage Rating=6.3V, Case/Package=0603, Category="Ceramic Capacitors", Lead Free="Lead Free", Manufacturer Part Number=JMK107BB7475KA-T, Mount="Surface Mount", Packaging="Cut Tape", Pricing 1="1=0.30000, 10=0.16700, 50=0.16700, 100=0.12200, 1000=0.10700, 10000=0.10100 (USD)", RoHS=Yes, RoHS Compliant=Yes, Stock 1=75256, Supplier 1=Mouser
  C11: ComponentLink1Description="New link", ComponentLink2Description=http://www.farnell.com/datasheets/2801343.pdf?src-supplier=Farnell, ComponentLink2URL=http://www.farnell.com/datasheets/2801343.pdf?src-supplier=Farnell, ComponentLink3Description=http://ds.yuden.co.jp/TYCOMPAS/ut/detail.do?productNo=JMK107BB7475KA-T&fileName=JMK107BB7475KA-T_SS&mode=specSheetDownload&src-supplier=Digi-Key, ComponentLink3URL=http://ds.yuden.co.jp/TYCOMPAS/ut/detail.do?productNo=JMK107BB7475KA-T&fileName=JMK107BB7475KA-T_SS&mode=specSheetDownload&src-supplier=Digi-Key, ComponentLink4Description="https://ds.yuden.co.jp/TYCOMPAS/ut/detail?pn=JMK107BB7475KA-T &u=M&src-supplier=Digi-Key", ComponentLink4URL="https://ds.yuden.co.jp/TYCOMPAS/ut/detail?pn=JMK107BB7475KA-T &u=M&src-supplier=Digi-Key", ComponentLink5Description=http://www.farnell.com/datasheets/2801343.pdf?src-supplier=Element14, ComponentLink5URL=http://www.farnell.com/datasheets/2801343.pdf?src-supplier=Element14, ComponentLink6Description=http://www.farnell.com/datasheets/2801343.pdf?src-supplier=Newark, ComponentLink6URL=http://www.farnell.com/datasheets/2801343.pdf?src-supplier=Newark
  C24: ComponentLink1Description=http://www.farnell.com/datasheets/2801343.pdf?src-supplier=Farnell, ComponentLink1URL=http://www.farnell.com/datasheets/2801343.pdf?src-supplier=Farnell, ComponentLink2Description=http://ds.yuden.co.jp/TYCOMPAS/ut/detail.do?productNo=JMK107BB7475KA-T&fileName=JMK107BB7475KA-T_SS&mode=specSheetDownload&src-supplier=Digi-Key, ComponentLink2URL=http://ds.yuden.co.jp/TYCOMPAS/ut/detail.do?productNo=JMK107BB7475KA-T&fileName=JMK107BB7475KA-T_SS&mode=specSheetDownload&src-supplier=Digi-Key, ComponentLink3Description="https://ds.yuden.co.jp/TYCOMPAS/ut/detail?pn=JMK107BB7475KA-T &u=M&src-supplier=Digi-Key", ComponentLink3URL="https://ds.yuden.co.jp/TYCOMPAS/ut/detail?pn=JMK107BB7475KA-T &u=M&src-supplier=Digi-Key", ComponentLink4Description=http://www.farnell.com/datasheets/2801343.pdf?src-supplier=Element14, ComponentLink4URL=http://www.farnell.com/datasheets/2801343.pdf?src-supplier=Element14, ComponentLink5Description=http://www.farnell.com/datasheets/2801343.pdf?src-supplier=Newark, ComponentLink5URL=http://www.farnell.com/datasheets/2801343.pdf?src-supplier=Newark
C12: library part Capacitor, "CAP CER 10UF X5R 0603", Capacitance=10uF, Case/Package=0603, Manufacturer=Murata, Max Operating Temperature=85°C, Min Operating Temperature=-55°C, Supplier Part Number 1=81-GRM188R6YA106MA3J, Tolerance=20%, Voltage Rating=35V, Category="Ceramic Capacitors", ComponentLink1Description=https://search.murata.co.jp/Ceramy/image/img/A01X/G101/ENG/GRM188R6YA106MA73-01A.pdf?src-supplier=Digi-Key, ComponentLink1URL=https://search.murata.co.jp/Ceramy/image/img/A01X/G101/ENG/GRM188R6YA106MA73-01A.pdf?src-supplier=Digi-Key, Manufacturer Part Number=GRM188R6YA106MA73J, Mount="Surface Mount", Packaging="Tape and Reel", Pricing 1="1=0.43000, 10=0.21100, 50=0.21100, 100=0.18100, 1000=0.11500, 10000=0.09300 (USD)", RoHS=Yes, RoHS Compliant=Yes, Stock 1=9408, Supplier 1=Mouser
C13: library part Capacitor, "Capacitor", Manufacturer="Kyocera AVX", Supplier Part Number 1=581-06035C104JAT4A, Category="Ceramic Capacitors", ComponentLink1Description="New link", Manufacturer Part Number=06035C104JAT4A, Pricing 1="1=0.11000, 10=0.04300, 50=0.04300, 100=0.03500, 1000=0.02000, 10000=0.01400 (USD)", RoHS=Yes, RoHS Compliant=Yes, Stock 1=26326, Supplier 1=Mouser
C20: library part Capacitor, "0603, 6.3V, X5R, 10 uF ± 10 %, T&R Q200 multilayer ceramic capacitor", Manufacturer="Taiyo Yuden", Supplier Part Number 1=963-JMK107ABJ106KAHT, Category="Ceramic Capacitors", Manufacturer Part Number=JMK107ABJ106KAHT, Pricing 1="1=0.30000, 10=0.10600, 50=0.10600, 100=0.07200, 1000=0.04800, 10000=0.03500 (USD)", RoHS=Yes, RoHS Compliant=Yes, Stock 1=12080, Supplier 1=Mouser
D1 D2 D3 D4 D11: "LED BLUE DIFFUSED 0603 SMD", Case/Package=0603, Color=Blue, Forward Voltage=3.2V, Manufacturer="Wurth Electronics", Supplier Part Number 1=710-150060BS55040, Test Current=20mA, ComponentLink1Description=http://www.farnell.com/datasheets/2621640.pdf?src-supplier=Farnell, ComponentLink1URL=http://www.farnell.com/datasheets/2621640.pdf?src-supplier=Farnell, ComponentLink2Description=https://www.we-online.de/web/en/index.php/download/media/07_electronic_components/download_center_1/application_notes_berichte/ano002_leds___the_future_of_horticultural_lighting/ANO002b_EN_LEDs_The_Future_of_Horticultural_Lighting.pdf?src-supplier=Digi-Key, ComponentLink2URL=https://www.we-online.de/web/en/index.php/download/media/07_electronic_components/download_center_1/application_notes_berichte/ano002_leds___the_future_of_horticultural_lighting/ANO002b_EN_LEDs_The_Future_of_Horticultural_Lighting.pdf?src-supplier=Digi-Key, ComponentLink3Description=https://katalog.we-online.de/pbs/datasheet/150060BS55040.pdf?src-supplier=Digi-Key, ComponentLink3URL=https://katalog.we-online.de/pbs/datasheet/150060BS55040.pdf?src-supplier=Digi-Key, Dominant Wavelength=470nm, Height=0.5mm, Length=1.6mm, Lens Size=0.8mm, Lens Style=Flat, Lens Transparency=Diffused, Luminous Intensity=80mcd, Manufacturer Part Number=150060BS55040, Mount="Surface Mount", Packaging="Tape and Reel", Pricing 1="1=0.18000, 10=0.16200, 50=0.13200, 100=0.11700, 1000=0.08800, 10000=0.08800 (USD)", RoHS=No, RoHS Compliant=No, Supplier 1=Mouser, Viewing Angle=140°, Width=0.8mm
D5 D6 D7 D8: "Balance Diode / MMSZ5232BS-7-F"
D9: library part CMP-1054-00066-1, "Switching Diode, 2-Pin SOD-323, Pb-Free, Tape and Reel", Manufacturer="On Semiconductor", ComponentLink1Description="Manufacturer URL", ComponentLink1URL=http://www.onsemi.com/, ComponentLink2Description=Datasheet, ComponentLink2URL=http://www.onsemi.cn/pub_link/Collateral/MMDL6050T1-D.PDF, ComponentLink3Description="Package Specification", ComponentLink3URL=http://www.onsemi.com/pub_link/Collateral/477-02.PDF.1, Configuration=Single, DatasheetVersion="Rev. 5", IF Max (A)=0.2, Mounting Technology="Surface Mount", PackageDescription="2-Pin SOD, Body 1.7 x 1.25 mm", PackageReference=SOD-323-2-477-02, PackageVersion="Rev. H, 03/2007", Packing="Tape and Reel", PartNumber=MMDL6050T1G, RoHS=TRUE, trr Max (ns)=4
D10 D69: "SMT Mono-color Chip LED Diffused"
D12: library part CMP-07200-000005-1, "TVS DIODE 32V 66V SOT23-3", Breakdown Voltage=35.6V, Capacitance=30pF, Clamping Voltage=66V, Manufacturer="ON Semiconductor", Max Junction Temp=+150°C, Package=318-08, Peak Pulse Current=8A, Peak Pulse Power=350W, Reverse Standoff Voltage=32V, Temperature="-55°C to +150°C", Temperature Range Low=-55°C, Automotive=Yes, Automotive Grade="Grade 0", Category=Diode, ComponentLink2Description=Datasheet, ComponentLink2URL=https://www.onsemi.com/pub/Collateral/NUP3105L-D.PDF, Device Class L1="Circuit Protection", Device Class L2="TVS Diodes", Device Class L3=unset, Digikey Description="TVS DIODE 32V 66V SOT23-3", Direction=Bidirectional, Footprint Url=https://www.onsemi.com/pub/Collateral/318-08.PDF, Height=1.11mm, Lead Free=Yes, Manufacturer Part Number=SZNUP3105LT3G, Mouser Description="32V Dual Line CAN Bus Protector in SOT-23 AEC-Q 24 V CAN Bus Protector in SOT-23", Number Of Channels=2, Octopart=https://octopart.com/sznup3105lt3g-on+semiconductor-54318507, RoHS=TRUE, Standoff Height=0.01mm, Temperature Range High=+150°C
FB1 FB2 FB3 FB4: "FERRITE BEAD 220 OHM 0603 1LN", Case Code (Imperial)=0603, Case Code (Metric)=1608, Current Rating=2.5A, DC Resistance (DCR)=40mR, Manufacturer=Murata, Max Operating Temperature=125°C, Min Operating Temperature=-55°C, Package Quantity=1, Supplier Part Number 1=81-BLM18SG221TN1D, Test Frequency=100MHz, Tolerance=25%, Case/Package=0603, Category=Inductors, Core Material=Ferrite, DC Current=2.5A, DC Resistance-Max=40mR, Depth=0.95mm, Height=0.8mm, Impedance=220R, Lead Free="Lead Free", Length=1.6mm, Manufacturer Part Number=BLM18SG221TN1D, Material=Ferrite,Steel, Max Current Rating=2.5A, Max DC Current=2.5A, Number of Circuits=1, Number of Lines=1, Number of Pins=2, Packaging="Tape and Reel", Pricing 1="1=0.13000, 10=0.07500, 50=0.07500, 100=0.05100, 1000=0.03800, 10000=0.03000 (USD)", Radiation Hardening=No, REACH SVHC="No SVHC", RoHS=Yes, RoHS Compliant=Yes, Series=BLM18S, Stock 1=126991, Supplier 1=Mouser, Termination=SMD/SMT, Weight=7.1E-05oz, Width=0.8mm
J1: "Micro MATE-N-LOK, Rectangular Power Connectors, Header, Plug, Wire-to-Board, 5 Position, 3mm [.118in] Centerline, Printed Circuit Board, UL 94V-0", Color=Black, Contact Current Rating=5A, Flammability Rating="UL94 V-0", Manufacturer="TE Connectivity", Max Operating Temperature=221°C, Min Operating Temperature=-40°C, Number of Power Positions=5, Package Quantity=215, Supplier Part Number 1=571-2-1445090-5, Approvals=CSA, Category=Connectors, Circuit Application=Power, ComponentLink1Description=https://datasheet.ciiva.com/9441/eng-cs-82181-softshell-high-density-0508-9441612.pdf?src-supplier=Avnet, ComponentLink1URL=https://datasheet.ciiva.com/9441/eng-cs-82181-softshell-high-density-0508-9441612.pdf?src-supplier=Avnet, ComponentLink2Description=https://datasheet.ciiva.com/729/eng-cd-1445090-b-729471.pdf?src-supplier=Digi-Key, ComponentLink2URL=https://datasheet.ciiva.com/729/eng-cd-1445090-b-729471.pdf?src-supplier=Digi-Key, Connector System=Wire-to-Board, Connector Type=Pin, Contact Material=Brass, Contact Plating=Gold,Tin, Contact Retention="No (Without)", Contact Type="Male Pin", ELV=Compliant, Fastening Type=Ramp, Height=8.11mm, Housing Color=Black, Housing Material=Nylon, Insulation Diameter=3mm, Lead Free="Lead Free", Length=19mm, Manufacturer Part Number=2-1445090-5, Mating Alignment="Yes (With)", Mating Retention="Yes (With)", Mount="Surface Mount", Number of Contacts=5, Number of Positions=5, Number of Rows=1, Orientation="Right Angle", Packaging=Tray, PCB Mount Alignment="No (Without)", PCB Mount Retention=With, PCB Mounting Orientation="Right Angle", PCB Thickness=0.062mm, Pitch=0.118inch, Plating Thickness=2.54um, Pricing 1="1=1.73000, 10=1.41000, 50=1.41000, 100=1.22000, 1000=0.95800, 10000=0.77900 (USD)", Radiation Hardening=No, RoHS=Yes, RoHS Compliant=Yes, Sealable="No (Without)", Series="Micro MATE-N-LOK", Stock 1=62, Strain Relief="No (Without)", Supplier 1=Mouser, Termination=SMD/SMT, VDE Tested=Yes, Width=3.86mm
P1: library part MHDR2X3, "Header, 3-Pin, Dual row", LatestRevisionDate=17-Jul-2002, LatestRevisionNote="Re-released for DXP Platform.", Publisher="Altium Limited"
P2: library part MHDR1X2, "Header, 2-Pin", LatestRevisionDate=17-Jul-2002, LatestRevisionNote="Re-released for DXP Platform.", Publisher="Altium Limited"
P3: library part "Header 2", "Header, 2-Pin", LatestRevisionDate=17-Jul-2002, LatestRevisionNote="Re-released for DXP Platform.", Publisher="Altium Limited"
Q1 Q2 Q3 Q4: "Trans Mosfet N-ch 20V 0.63A 3-PIN SOT-523 T/r", Case/Package=SOT-523, Continuous Drain Current (ID)=630mA, Drain to Source Voltage (Vdss)=20V, Input Capacitance=60.67pF, Manufacturer=Diodes, Max Operating Temperature=150°C, Max Power Dissipation=280mW, Min Operating Temperature=-55°C, Supplier Part Number 1=621-DMG1012T-13, Manufacturer Part Number=DMG1012T-13, Mount="Surface Mount", Packaging="Tape and Reel", Pricing 1="1=0.41000, 10=0.19900, 50=0.19900, 100=0.09600, 1000=0.05700, 10000=0.03900 (USD)", Rds On Max=400mR, RoHS=Yes, Stock 1=11363, Supplier 1=Mouser
Q5 Q6 Q8 Q9: "MOSFET 57W 1MHz Automotive; AEC-Q101", Case/Package=DPAK+, Manufacturer=Toshiba, Manufacturer Part Number=TK25S06N1L,LQ(O, Supplier Part Number 1=264-TK25S06N1LLXHQCT-ND, Category=MOSFETs, Pricing 1="1=0.89000, 10=0.75400, 50=0.75400, 100=0.56000, 1000=0.39100, 10000=0.33300 (USD)", RoHS=No, Stock 1=5332, Supplier 1=Digi-Key
Q7: library part CMP-2000-06255-1, "P-Channel Logic Level PowerTrench(R) MOSFET, -60 V, -1.25 A, 3-Pin SOT23, RoHS, Tape and Reel", Continuous Drain Current Id=1.25A, Current Id Max=1.2A, Current Temperature=25°C, Drain Source Voltage Vds=60V, Manufacturer="Fairchild Semiconductor", On Resistance Rds(on)=170mohm, Operating Temperature Max=150°C, Operating Temperature Min=-55°C, Operating Temperature Range=-55°Cto+150°C, Package / Case=SOT-23, Package Description="3-Pin Small Outline Transistor, Body 2.92 x 1.4 mm, Pitch 0.95 mm", Package Reference=SSOT3L, Package Version="Rev. 3, 05/2015", Power Dissipation Pd=500mW, Pulse Current Idm=10A, Rds(on) Test Voltage Vgs=-10V, Threshold Voltage Vgs Typ=20V, Voltage Vds Typ=-60V, Voltage Vgs th Max=-3V, Datasheet URL=https://www.fairchildsemi.com/datasheets/FD/FDN5618P.pdf, Datasheet Version="Rev. C, 10/2000", Device Marking=618, External Depth=2.5mm, External Length / Height=1.12mm, External Width=3.05mm, Full Power Rating Temperature=25°C, Manufacturer URL=https://www.fairchildsemi.com/, Mounting Technology=SurfaceMount, MSL=–, No. of Pins=3, Package URL=https://www.fairchildsemi.com/package-drawings/MA/MA03B.pdf, SMD Marking=618, SVHC=NoSVHC(19-Dec-2012), Tape Width=8mm, Transistor Case Style=SOT-23, Transistor Polarity=PChannel, Voltage Vds=60V, Voltage Vgs Max=20V, Voltage Vgs Rds on Measurement=-10V
R1 R2 R3 R4: library part Resistor, "RES SMD 21 OHM 1% 1.5W 2512", Case/Package=2512, Manufacturer="Vishay Dale", Max Operating Temperature=155°C, Max Power Dissipation=1.5W, Min Operating Temperature=-55°C, Package Quantity=2000, Resistance=21R, Resistor Type="Thick Film", Supplier Part Number 1=71-CRCW251221R0FKEGH, Temperature Coefficient=100ppm/°C, Tolerance=1%, Category="Chip SMD Resistors", ComponentLink1Description=http://www.vishay.com/docs/20043/crcwhpe3.pdf?src-supplier=Digi-Key, ComponentLink1URL=http://www.vishay.com/docs/20043/crcwhpe3.pdf?src-supplier=Digi-Key, Features="Automotive AEC-Q200", Height=0.028inch, Lead Free="Lead Free", Length=0.248inch, Manufacturer Part Number=CRCW251221R0FKEGHP, Number of Terminations=2, Packaging="Tape and Reel", Pricing 1="1=0.71000, 10=0.58900, 50=0.58900, 100=0.39600, 1000=0.23700, 10000=0.20600 (USD)", RoHS=Yes, RoHS Compliant=Yes, Series=CRCW-HP, Stock 1=1060, Supplier 1=Mouser, Width=0.124inch
R5 R6 R7 R8 R28 R30 R69: library part Resistor, "High Precision-High Stability Chip Resistor Thin Film 0603 583Ohm 0.5% Paper T/R", Case/Package=0603, Manufacturer=Yageo, Max Operating Temperature=155°C, Max Power Dissipation=100mW, Min Operating Temperature=-55°C, Resistance=583R, Resistor Type="Thin Film", Supplier Part Number 1=603-RT0603DRE07583RL, Temperature Coefficient=50ppm/°C, Tolerance=0.5%, Category="Chip SMD Resistors", ComponentLink1Description=http://www.yageo.com/documents/recent/PYu-RT_1-to-0.01_RoHS_L_9.pdf?src-supplier=Digi-Key, ComponentLink1URL=http://www.yageo.com/documents/recent/PYu-RT_1-to-0.01_RoHS_L_9.pdf?src-supplier=Digi-Key, Manufacturer Part Number=RT0603DRE07583RL, Number of Terminations=2, Packaging="Tape and Reel", Pricing 1="1=0.14000, 10=0.07400, 50=0.07400, 100=0.02600, 1000=0.01900, 10000=0.01200 (USD)", RoHS=Yes, Stock 1=17347, Supplier 1=Mouser
R9 R10 R12 R16 R20 R33 R34: library part Resistor, "Resistor", Manufacturer=Bourns, Supplier Part Number 1=652-CMP0603AFX-1002L, Manufacturer Part Number=CMP0603AFX-1002ELF, Pricing 1="1=0.21000, 10=0.09200, 50=0.09200, 100=0.05300, 1000=0.02900, 10000=0.02200 (USD)", RoHS=No, Stock 1=10216, Supplier 1=Mouser
R11 R13 R14 R15 R17: library part Resistor, "VISHAY - CRCW06031K00FKEA - SMD Chip Resistor, 0603 [1608 Metric], 1 kohm, CRCW e3 Series, 75 V, Thick Film, 100 mW", Case Code (Imperial)=0603, Case Code (Metric)=1608, Manufacturer="Vishay Dale", Manufacturer Part Number=CRCW06031K00FKEA, Max Operating Temperature=155°C, Max Power Dissipation=100mW, Min Operating Temperature=-55°C, Package Quantity=10, Resistance=1kR, Resistance Tolerance=1%, Resistor Type="Thick Film", Supplier Part Number 1=1694265, Temperature Coefficient=100ppm/°C, Voltage Rating=75V, Case/Package=0603, Category="Chip SMD Resistors", ComponentLink1Description=https://datasheet.ciiva.com/11808/0900766b80d98afc-11808625.pdf?src-supplier=RSComponents, ComponentLink1URL=https://datasheet.ciiva.com/11808/0900766b80d98afc-11808625.pdf?src-supplier=RSComponents, ComponentLink2Description=https://datasheet.ciiva.com/8336/dcrcwe3-8336822.pdf?src-supplier=Avnet, ComponentLink2URL=https://datasheet.ciiva.com/8336/dcrcwe3-8336822.pdf?src-supplier=Avnet, ComponentLink3Description=https://datasheet.ciiva.com/16515/dcrcwe3-16515078.pdf?src-supplier=Avnet+Asia, ComponentLink3URL=https://datasheet.ciiva.com/16515/dcrcwe3-16515078.pdf?src-supplier=Avnet+Asia, ComponentLink4Description=https://datasheet.ciiva.com/3257/dcrcwe3-3257132.pdf?src-supplier=Avnet, ComponentLink4URL=https://datasheet.ciiva.com/3257/dcrcwe3-3257132.pdf?src-supplier=Avnet, ComponentLink5Description=https://datasheet.ciiva.com/2465/dcrcwe3-2465534.pdf?src-supplier=Digi-Key, ComponentLink5URL=https://datasheet.ciiva.com/2465/dcrcwe3-2465534.pdf?src-supplier=Digi-Key, ComponentLink6Description=https://datasheet.ciiva.com/16893/dcrcwe3-16893742.pdf?src-supplier=Avnet+Europe, ComponentLink6URL=https://datasheet.ciiva.com/16893/dcrcwe3-16893742.pdf?src-supplier=Avnet+Europe, ComponentLink7Description=https://datasheet.ciiva.com/2465/dcrcwe3-2465535.pdf?src-supplier=Digi-Key, ComponentLink7URL=https://datasheet.ciiva.com/2465/dcrcwe3-2465535.pdf?src-supplier=Digi-Key, ComponentLink8Description=https://datasheet.ciiva.com/2465/dcrcwe3-2465536.pdf?src-supplier=Digi-Key, ComponentLink8URL=https://datasheet.ciiva.com/2465/dcrcwe3-2465536.pdf?src-supplier=Digi-Key, ComponentLink9Description=https://datasheet.ciiva.com/26316/fld-crcw-e3-data-en-26316551.pdf?src-supplier=Distrelec, ComponentLink9URL=https://datasheet.ciiva.com/26316/fld-crcw-e3-data-en-26316551.pdf?src-supplier=Distrelec, ComponentLink10Description=https://datasheet.ciiva.com/46441/1720486-46441623.pdf?src-supplier=Element14, ComponentLink10URL=https://datasheet.ciiva.com/46441/1720486-46441623.pdf?src-supplier=Element14, ComponentLink11Description=https://datasheet.ciiva.com/46441/1720486-46441622.pdf?src-supplier=Element14, ComponentLink11URL=https://datasheet.ciiva.com/46441/1720486-46441622.pdf?src-supplier=Element14, ComponentLink12Description=https://datasheet.ciiva.com/46385/1697337-46385497.pdf?src-supplier=Element14, ComponentLink12URL=https://datasheet.ciiva.com/46385/1697337-46385497.pdf?src-supplier=Element14, ComponentLink13Description=https://datasheet.ciiva.com/16199/dcrcwe3-16199053.pdf?src-supplier=Future+Electronics, ComponentLink13URL=https://datasheet.ciiva.com/16199/dcrcwe3-16199053.pdf?src-supplier=Future+Electronics, Construction=Rectangular, Contact Plating=Tin, Depth=0.85mm, Features="Automotive AEC-Q200", Height=0.45mm, Lead Free="Lead Free", Length=1.55mm, Military Standard=Not, Mount="Surface Mount", Number of Pins=2, Number of Terminations=2, Packaging="Tape and Reel", Power Rating=100mW, Pricing 1="5000=0.00500, 10000=0.00400, 20000=0.00400 (USD)", Radiation Hardening=No, REACH SVHC=Unknown, RoHS=Yes, RoHS Compliant=Yes, Series=CRCW, Size Code=0603, Stock 1=30000, Supplier 1=RSComponents, Technology="THICK FILM", Termination=SMD/SMT, Tolerance=1%, Voltage Rating (DC)=75V, Weight=7.1E-05oz, Width=0.033inch
R18 R21 R22: library part Resistor, "Resistor", Manufacturer="KOA Speer", Supplier Part Number 1=660-RN73R1JTD1000F50, Manufacturer Part Number=RN73R1JTTD1000F50, Pricing 1="1=0.20000, 10=0.20000, 50=0.15200, 100=0.11800, 1000=0.07700, 10000=0.04700 (USD)", RoHS=No, Stock 1=4124, Supplier 1=Mouser
R19: library part Resistor, "Res Metal Plate 3921 0.004 Ohm 1% 3W ±75ppm/C Pad SMD Automotive T/R", Case/Package=3921, Manufacturer=Yageo, Max Operating Temperature=170°C, Max Power Dissipation=3W, Min Operating Temperature=-65°C, Resistance=4mR, Resistor Type="Metal Element", Supplier Part Number 1=603-PU3921FKM130R004, Temperature Coefficient=75ppm/°C, Tolerance=1%, Category="Chip SMD Resistors", ComponentLink1Description=http://www.yageo.com/documents/recent/PYu-PU_51_RoHS_L_3.pdf?src-supplier=Digi-Key, ComponentLink1URL=http://www.yageo.com/documents/recent/PYu-PU_51_RoHS_L_3.pdf?src-supplier=Digi-Key, Features="Moisture Resistant,Automotive AEC-Q200", Height=0.019inch, Length=0.394inch, Manufacturer Part Number=PU3921FKM130R004L, Number of Terminations=2, Packaging="Tape and Reel", Pricing 1="1=1.40000, 10=1.14000, 50=1.14000, 100=0.75800, 1000=0.53100, 10000=0.45200 (USD)", RoHS=Yes, RoHS Compliant=Yes, Stock 1=2383, Supplier 1=Mouser, Width=0.205inch
R23 R24 R25 R26 R35: library part Resistor, "Resistor", Case/Package=Molded, Manufacturer=Vishay, Max Operating Temperature=155°C, Min Operating Temperature=-55°C, Power Rating=100mW, Resistance=1MR, Resistor Type="Thick Film", Temperature Coefficient=100ppm/°C, Tolerance=1%, Category="Chip SMD Resistors", Contact Plating=Tin, Lead Free="Lead Free", Length=1.55mm, Manufacturer Part Number=CRCW06031M00FKEAC, Mount="Surface Mount", RoHS Compliant=Yes, Termination=Wraparound
R27 R29: library part Resistor, "Resistor", Manufacturer=Vishay, Supplier Part Number 1=71-CRCW06031K10JNEAC, Category="Chip SMD Resistors", Manufacturer Part Number=CRCW06031K10JNEAC, Pricing 1="1=0.10000, 10=0.03000, 50=0.03000, 100=0.01200, 1000=0.00500, 10000=0.00300 (USD)", RoHS=Yes, RoHS Compliant=Yes, Stock 1=51915, Supplier 1=Mouser
R32: library part Resistor, "Bus termination resistor"
SW1: library part CMP-1452-00002-1, "WS-TASV SMD Tact Switch 6X6 mm", Manufacturer="Wuerth Elektronik", ComponentLink1Description="Manufacturer URL", ComponentLink1URL=http://www.we-online.com, ComponentLink2Description=Datasheet, ComponentLink2URL=http://katalog.we-online.de/em/datasheet/4301x2.pdf, NoPins=04, PackageReference=430152043836, PartNumber=430152043836
U1: "3 to 5-Series Cell Li-Ion and Li-Phosphate Battery Monitor", Case/Package=TSSOP, Manufacturer="Texas Instruments", Manufacturer Part Number=BQ7692003PWR, Max Operating Temperature=85°C, Min Operating Temperature=-40°C, Operating Supply Voltage=25V, Output Voltage=3.6V, Package Quantity=2000, Supplier Part Number 1=595-BQ7692003PWR, Category="Battery Management", Contact Plating=Gold, Fault Protection="Over Current,Short Circuit,Over/Under Voltage", Interface=I2C, Lead Free="Lead Free", Mount="Surface Mount", Number of Pins=20, Packaging="Tape and Reel", RoHS Compliant=Yes, Supplier 1=Mouser, Weight=0.002758oz
U2: library part CMP-0315-00036-2, "3.3V CAN Transceiver with Standby Mode, Loop-back, 6 mA, -40 to 125 degC, 8-pin SOIC (D), Green (RoHS & no Sb/Br)", Bus Fault Voltage(V)=+/-30, Drivers Per Package=1, Low Power Mode=Standby, Manufacturer="Texas Instruments", Rating=Catalog, Supply Voltage(s)(V)=3.3, Code_JEDEC=MS-012AA, ComponentLink1Description=Datasheet, ComponentLink1URL=http://www.ti.com/general/docs/lit/getliterature.tsp?genericPartNumber=SN65HVD233&fileType=pdf, DatasheetVersion=SLLS557F, Eco-Plan="Green (RoHS & no Sb/Br)", Features="Loop Back", ICC(Max)(mA)=6, Isolated=No, Mounting Technology="Surface Mount", PackageDescription="8-Pin Plastic Small Outline Integrated Circuit, 4.9 x 3.9 mm, Pitch 1.27 mm Pitch", PackageReference=D0008A, PackageVersion="revM, Jun-2011", PartNumber=SN65HVD233D, Receivers Per Package=1, SubFamily=CAN, Transient Pulse Protection(V)="-100 to 100"
U3: library part CMP-12105-000014-1, "IC MCU 32BIT 128KB FLASH 32QFPN", Ambient Temperature Range High=+85°C, Ambient Temperature Range Low=-40°C, Frequency=80MHz, Manufacturer=STMicroelectronics, Max Junction Temp=+105°C, Max Supply Voltage=3.6V, Min Supply Voltage=1.62V, Package=UFQFPN32-A0B8, Temperature="-40°C to +85°C", Automotive=No, Category=IC, ComponentLink2Description=Datasheet, ComponentLink2URL=https://www.st.com/resource/en/datasheet/stm32l432kb.pdf, Core Architecture="ARM Cortex-M4", Data Bus Width=32bits, Device Class L1="Integrated Circuits (ICs)", Device Class L2="Embedded Processors and Controllers", Device Class L3=Microcontrollers, Digikey Description="IC MCU 32BIT 128KB FLASH 32QFPN", Height=0.6mm, Interface=I2C,SPI,UART,USART,USB,IrDA, Ipc Land Pattern Name=QFN50P500X500X55-32, Lead Free=Yes, Manufacturer Part Number=STM32L432KBU6, Memory Size=128KBytes, Memory Type=FLASH, Number Of A/D Converters=1, Number Of Adc Channels=10, Number Of Cores=1, Number Of I2C Channels=2, Number Of I/Os=26, Number Of Spi Channels=2, Number Of Timers/Counters=8, Number Of Uart Channels=1, Octopart=https://octopart.com/stm32l432kbu6-stmicroelectronics-74568735, Ram Size=64KBytes, RoHS=TRUE, Temperature Range High=+85°C, Temperature Range Low=-40°C

## Free pads (board coordinates)
  round 7 hole 3.3 mask+0: MH(17.9,48)
  round 7 hole 3.3 unplated mask+0: MH(25.5,5) MH(76,5)

## Via types
v1: diameter 0.6, hole 0.3, Top Layer to Bottom Layer, 303 vias

## Nets (pads, with @x,y where several pads share a name; then routed paths per layer and width w, separated by ;. In a path a pad name is that pad's centre, name@x,y a point inside that pad or via, vN(x,y) a via of type N, cw(c..) or ccw(c..) an arc to the next point about the centre after c; other vN are vias at no path point)
ALERT: R35.1 U1.20 U3.25 | length 25.2
  Top Layer w0.254: U1.20 10.8,34.274 10.949,34.125 21.95,34.125 v1(22.6,34.775) 21.223,34.775 21,34.998 R35.1 ; U3.25 29,39.875 29.193,39.682 29.193,39.457 v1(29.675,38.975)
  Bottom Layer w0.254: v1(22.6,34.775) 25.475,34.775 v1(29.675,38.975)
"Bat +": "BAT +1.1" C10.2 R22.2 U1.9 | length 120
  Top Layer w0.381: 1.45,48.5 1.45,44.454 1.673,44.231 4.413,44.231 ; C10.2 4.413,45.137 4.413,44.231 ; U1.9 5.6,42.851 5.451,43 4.738,43 4.413,43.325 R22.2 4.413,44.231
  Bottom Layer w1.5: 3.925,49.475 4.225,49.175 4.225,46.025 6.025,44.225 12.125,44.225 14.35,42 14.35,34.054 15.229,33.175 28.35,33.175 31.675,29.85 31.675,23.379 32.554,22.5 66.5,22.5 72,28 72,43.5 72.5,44
  other v1: 1,49 2,49 3,49 4,49 5,49 2,50 3,50 4,50 5,50 3,51 4,51 5,51
CAN_LBK: U2.5 U3.27 | length 17.7
  Top Layer w0.2: U3.27 28.9,40.925 29.75,40.925 30.775,41.95 35.025,41.95 35.6,41.375 35.6,38.4 36.242,37.758 39.413,37.758 40.655,39 U2.5
  Top Layer w0.25: U2.5 41.267,39.425 41.567,39.125 v1(41.575,39.125)
CAN_N: D12.2 P2.1 R32.1 U2.6 | length 13.5
  Top Layer w0.25: U2.6 39.385,39.85 39.21,40.025 39.148,40.025 39.002,40.171 39.002,40.221 38.948,40.275 38.948,40.56 38.925,40.583 38.925,40.854 39.071,41 39.375,41 39.65,41.275 D12.2 39.65,41.375 40.3,42.025 40.3,44 39.45,44.85 R32.1 39.45,45.05 39.225,45.275 39.098,45.275 38.952,45.421 38.952,46.844 38.452,47.344 38.452,48.493 38.598,48.639 39.589,48.639 39.65,48.7 P2.1@39.65,50.075
CAN_P: D12.1 P2.2 R32.2 U2.7 | length 13.1
  Top Layer w0.25: P2.2 36.923,49.102 37.802,49.102 37.948,48.956 37.948,47.136 38.448,46.636 38.448,45.421 38.302,45.275 38.175,45.275 37.95,45.05 R32.2 ; D12.1@37.665,41.24 D12.1 ; R32.2@37.725,45.075 37.95,44.85 37.1,44 37.1,42.025 37.75,41.375 D12.1 ; U2.7 38.115,39.85 38.29,40.025 38.352,40.025 38.498,40.171 38.498,40.374 38.475,40.397 38.475,40.854 38.329,41 38.025,41 37.75,41.275 D12.1
CAN_RX: U2.4 U3.21 | length 20.4
  Top Layer w0.25: U3.21 26.75,36.6 31.675,31.675 39.85,31.675 40.655,32.48 U2.4
CAN_TX: U2.1 U3.22 | length 12.9
  Top Layer w0.25: U3.22 27.25,37.375 28.6,36.025 30.65,33.975 U2.1
CHG: Q7.2 U1.2 | length 56.1
  Top Layer w0.381: U1.2 10.154,41.229 10.154,41.95 10.347,42.144 v1(10.347,42.203) ; Q7.2 v1(44.925,20.05)
  Bottom Layer w0.381: v1(10.347,42.203) 10.347,32.953 13.475,29.825 27.952,29.825 28.175,29.602 28.175,21.075 29.175,20.075 38.175,20.075 38.2,20.05 v1(44.925,20.05)
DSG: FB1.2 FB2.2 R23.1 R24.1 U1.1 | length 80.3
  Top Layer w0.381: U1.1 10.8,41.535 10.809,41.544 11.044,41.544 v1(11.5,42) ; v1(48.5,21) 48.542,21.042 48.642,21.042 49.4,21.8 FB1.2 FB1.2@49.6,21.8 ; R23.1 53.162,18.688 53.016,18.688 52.793,18.911 52.793,21.017 52.01,21.8 FB1.2@49.6,21.8 ; R24.1 63.075,19.4 62.915,19.56 62.915,20.284 62.425,20.775 62.425,21.45 62.075,21.8 FB2.2 58.525,21.8 58.25,22.075 49.875,22.075 FB1.2@49.6,21.8
  Bottom Layer w0.381: v1(11.5,42) 11.5,34.125 14.675,30.95 20.025,30.95 20.3,30.675 28.1,30.675 29.275,29.5 29.275,21.7 29.975,21 v1(48.5,21)
GND: "BAT -1.1" C1.1 C6.2 C8.1 C9.1 C10.1 C11.1 C12.1 C13.1 C16.1 C18.1 C20.1 C22.1 C23.1 C24.1 D12.3 P1.5 P3.2 pad.MH@17.9,48 Q7.1 R18.1 R19.2 R28.2 R30.2 R34.2 R35.2 R69.2 U1.3 U2.2 U2.8 U3.16 U3.32 U3.33 | length 79
  Top Layer w0.2: C22.1 23.163,38.138 23.163,39.763 v1(23.175,39.775) 23.234,39.775 23.334,39.875 U3.16 ; U3.32 28.891,43.415 29.04,43.415 v1(29.525,43.9)
  Top Layer w0.25: v1(37.825,43.525) v1(39.575,43.525) ; 42.38,6.27 43.46,7.35 ; 43.46,7.75 43.46,9.62